# Altium PCB AP1220_MachXO2_DB.PcbDoc (part 1 of 2)
Units mil, origin at the board's own origin, x right, y up, seen from the top; angles counter-clockwise.
Board outline 3005 x 3350 mil, 4 copper layers (Top Layer, GND PLANE, POWER PLANE, Bottom Layer); 120 components, 198 nets, 716 pads, 269 vias.
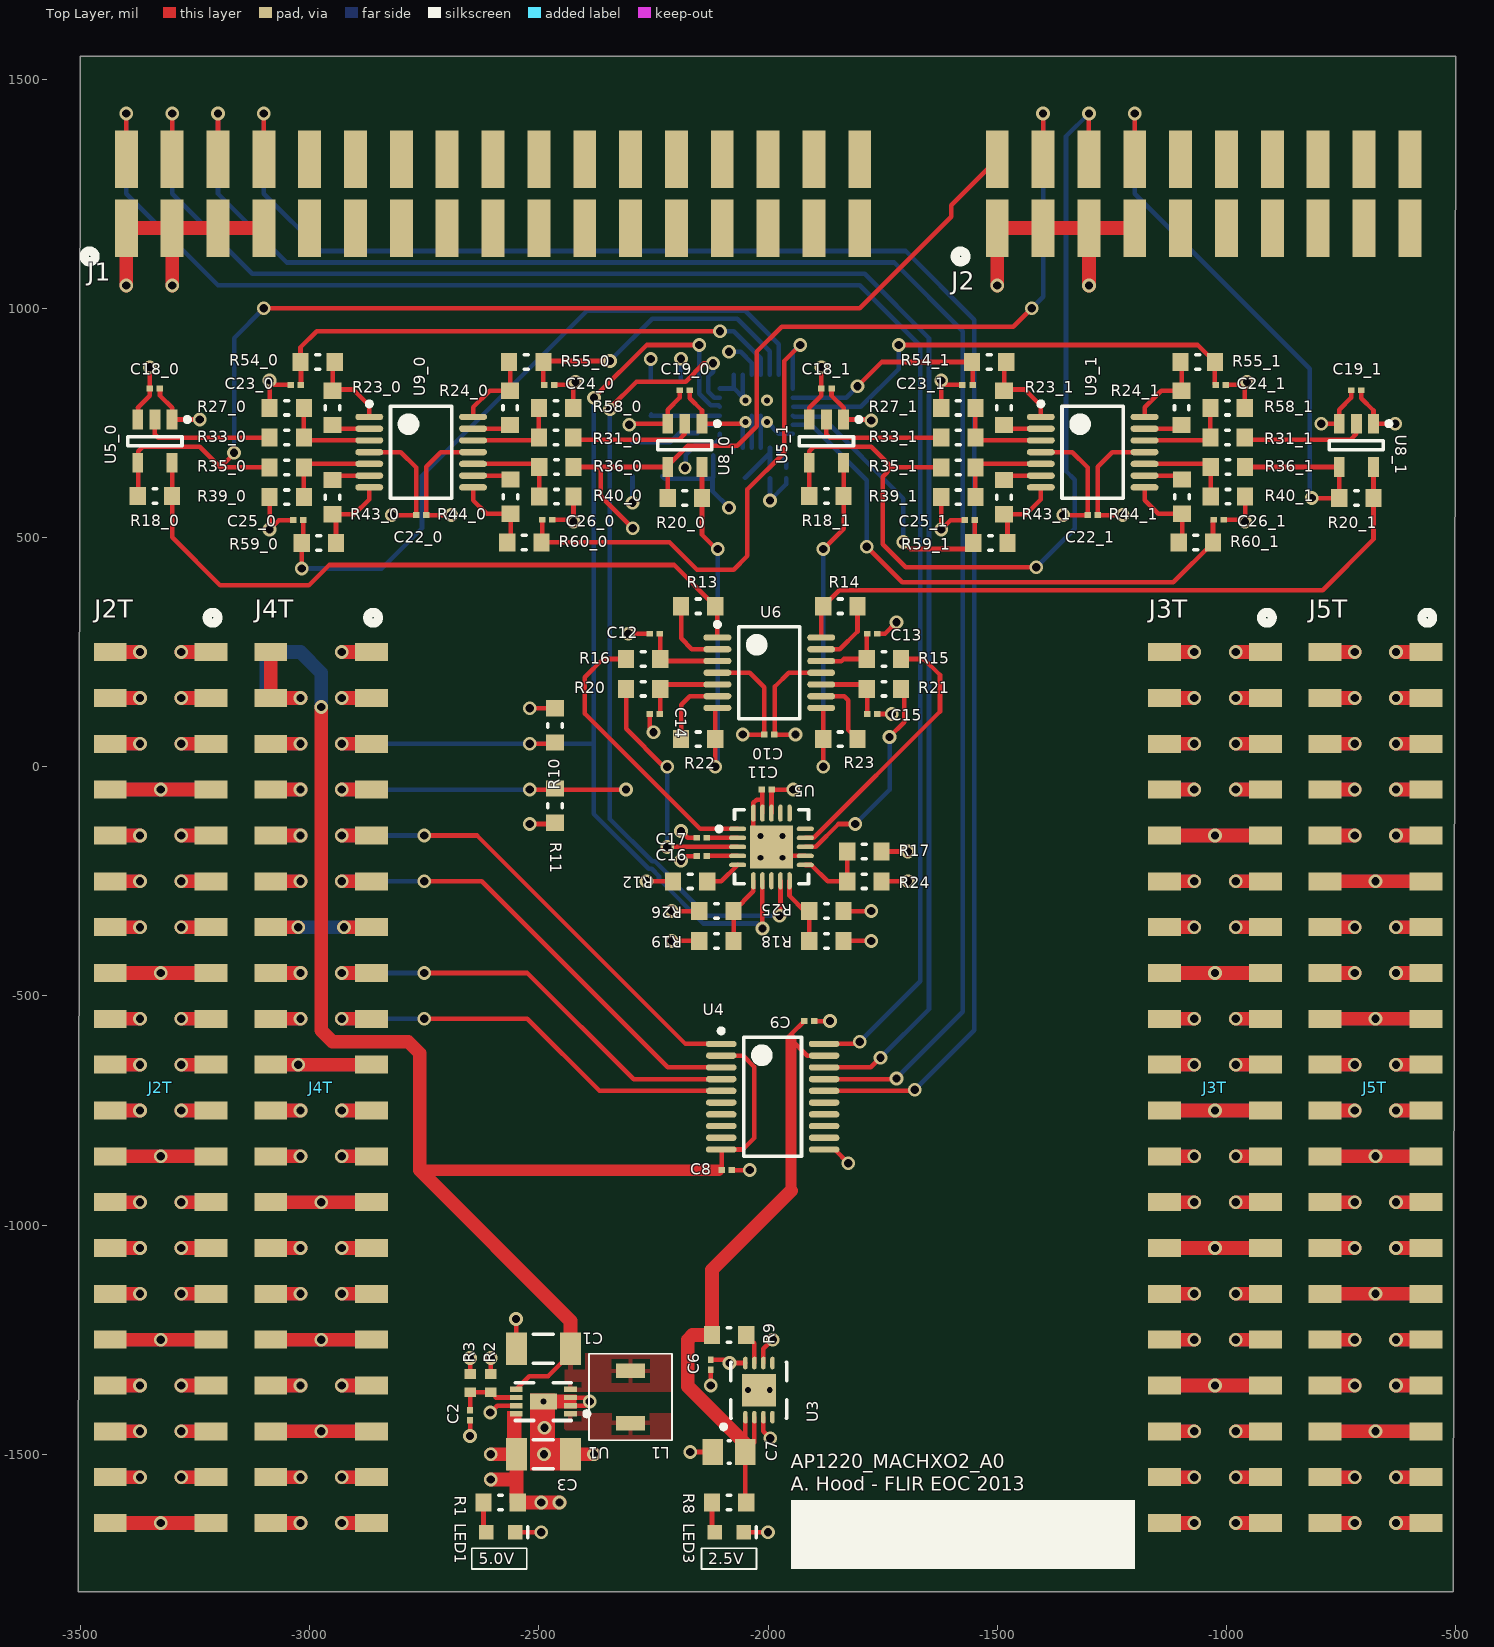
[diagram p0: Top Layer view]
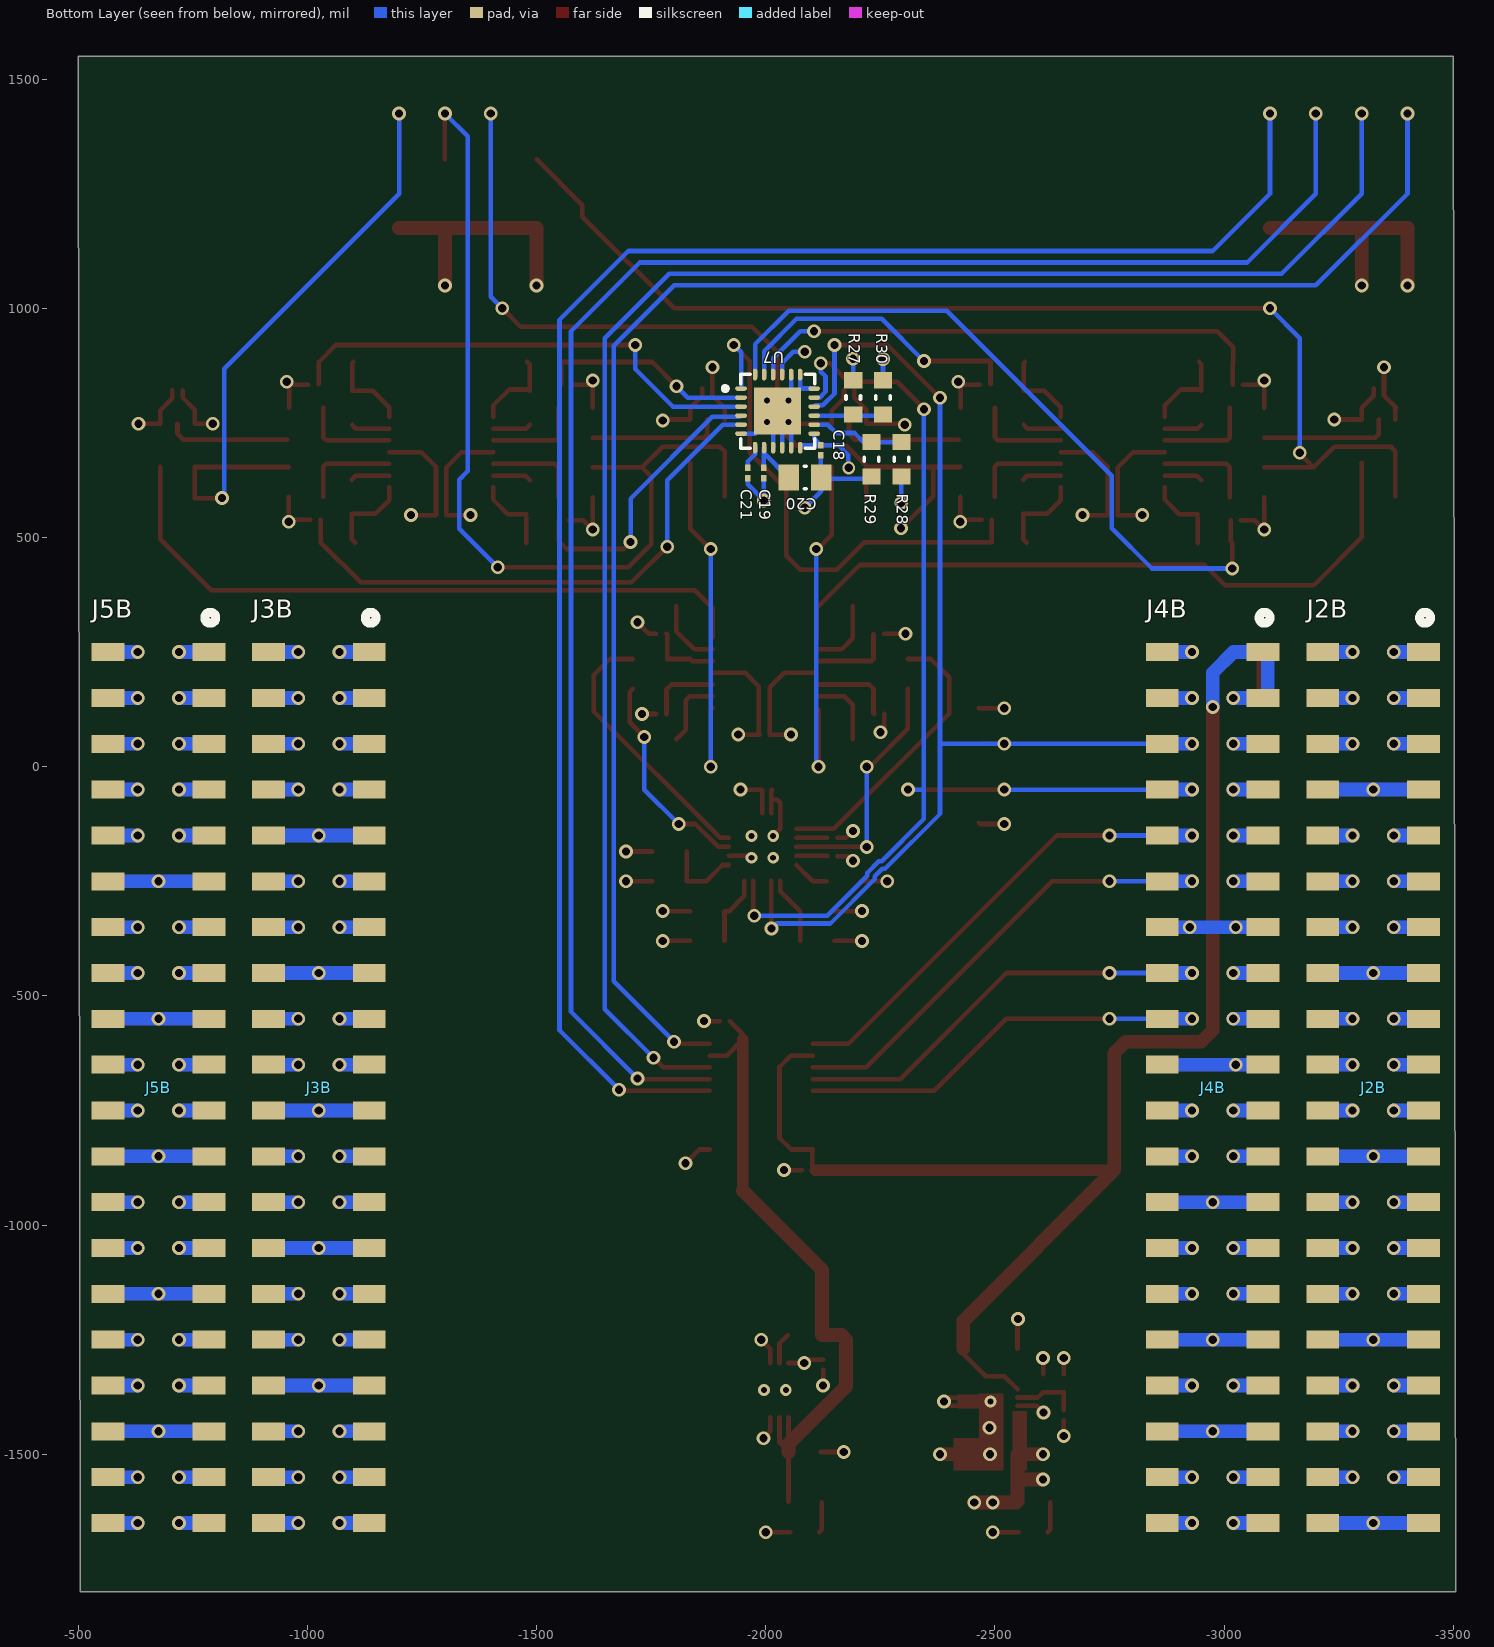
[diagram p1: Bottom Layer view, seen from below]
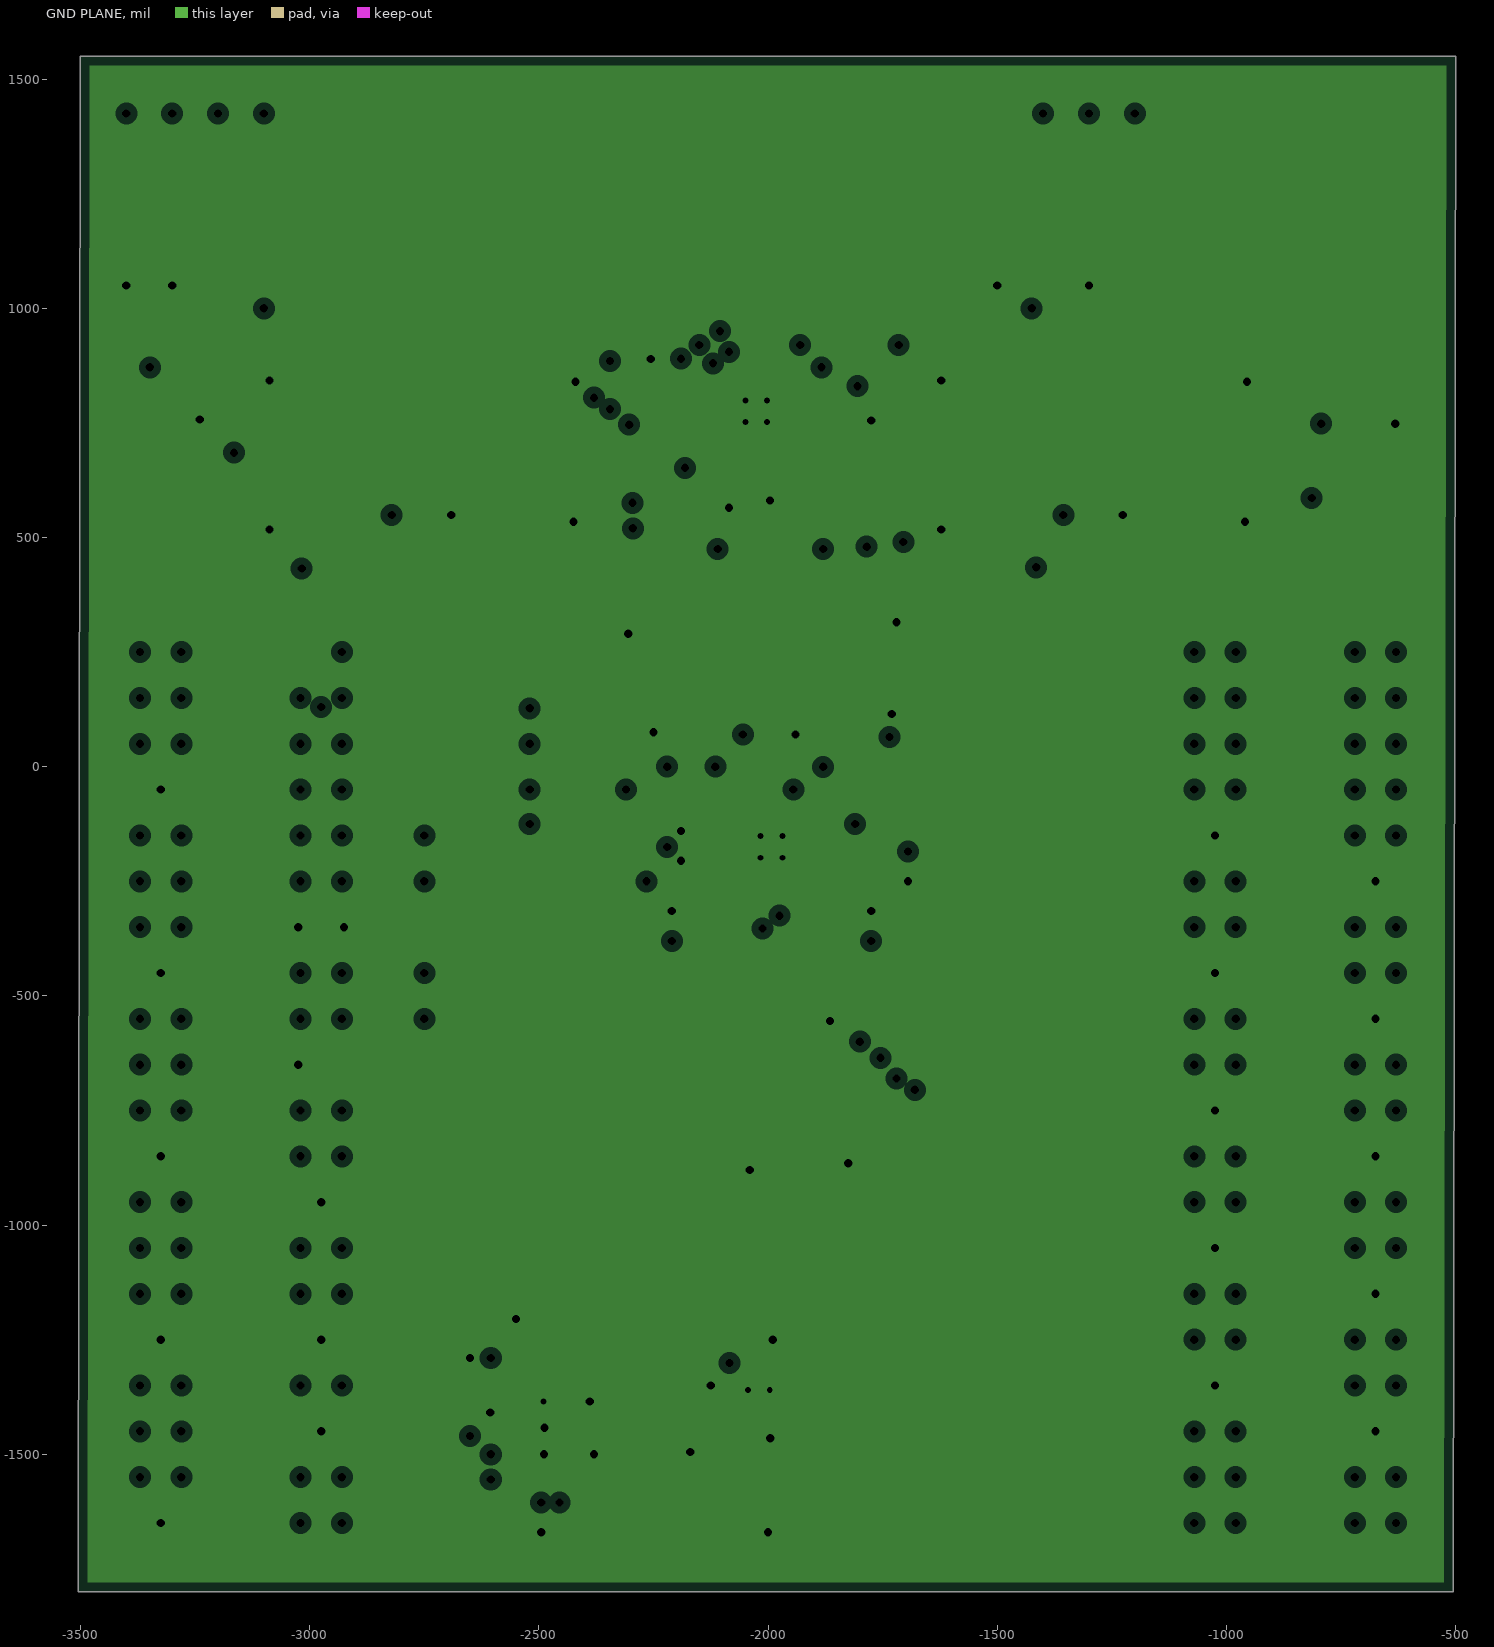
[diagram p2: GND PLANE, clearances drawn from the general rule]
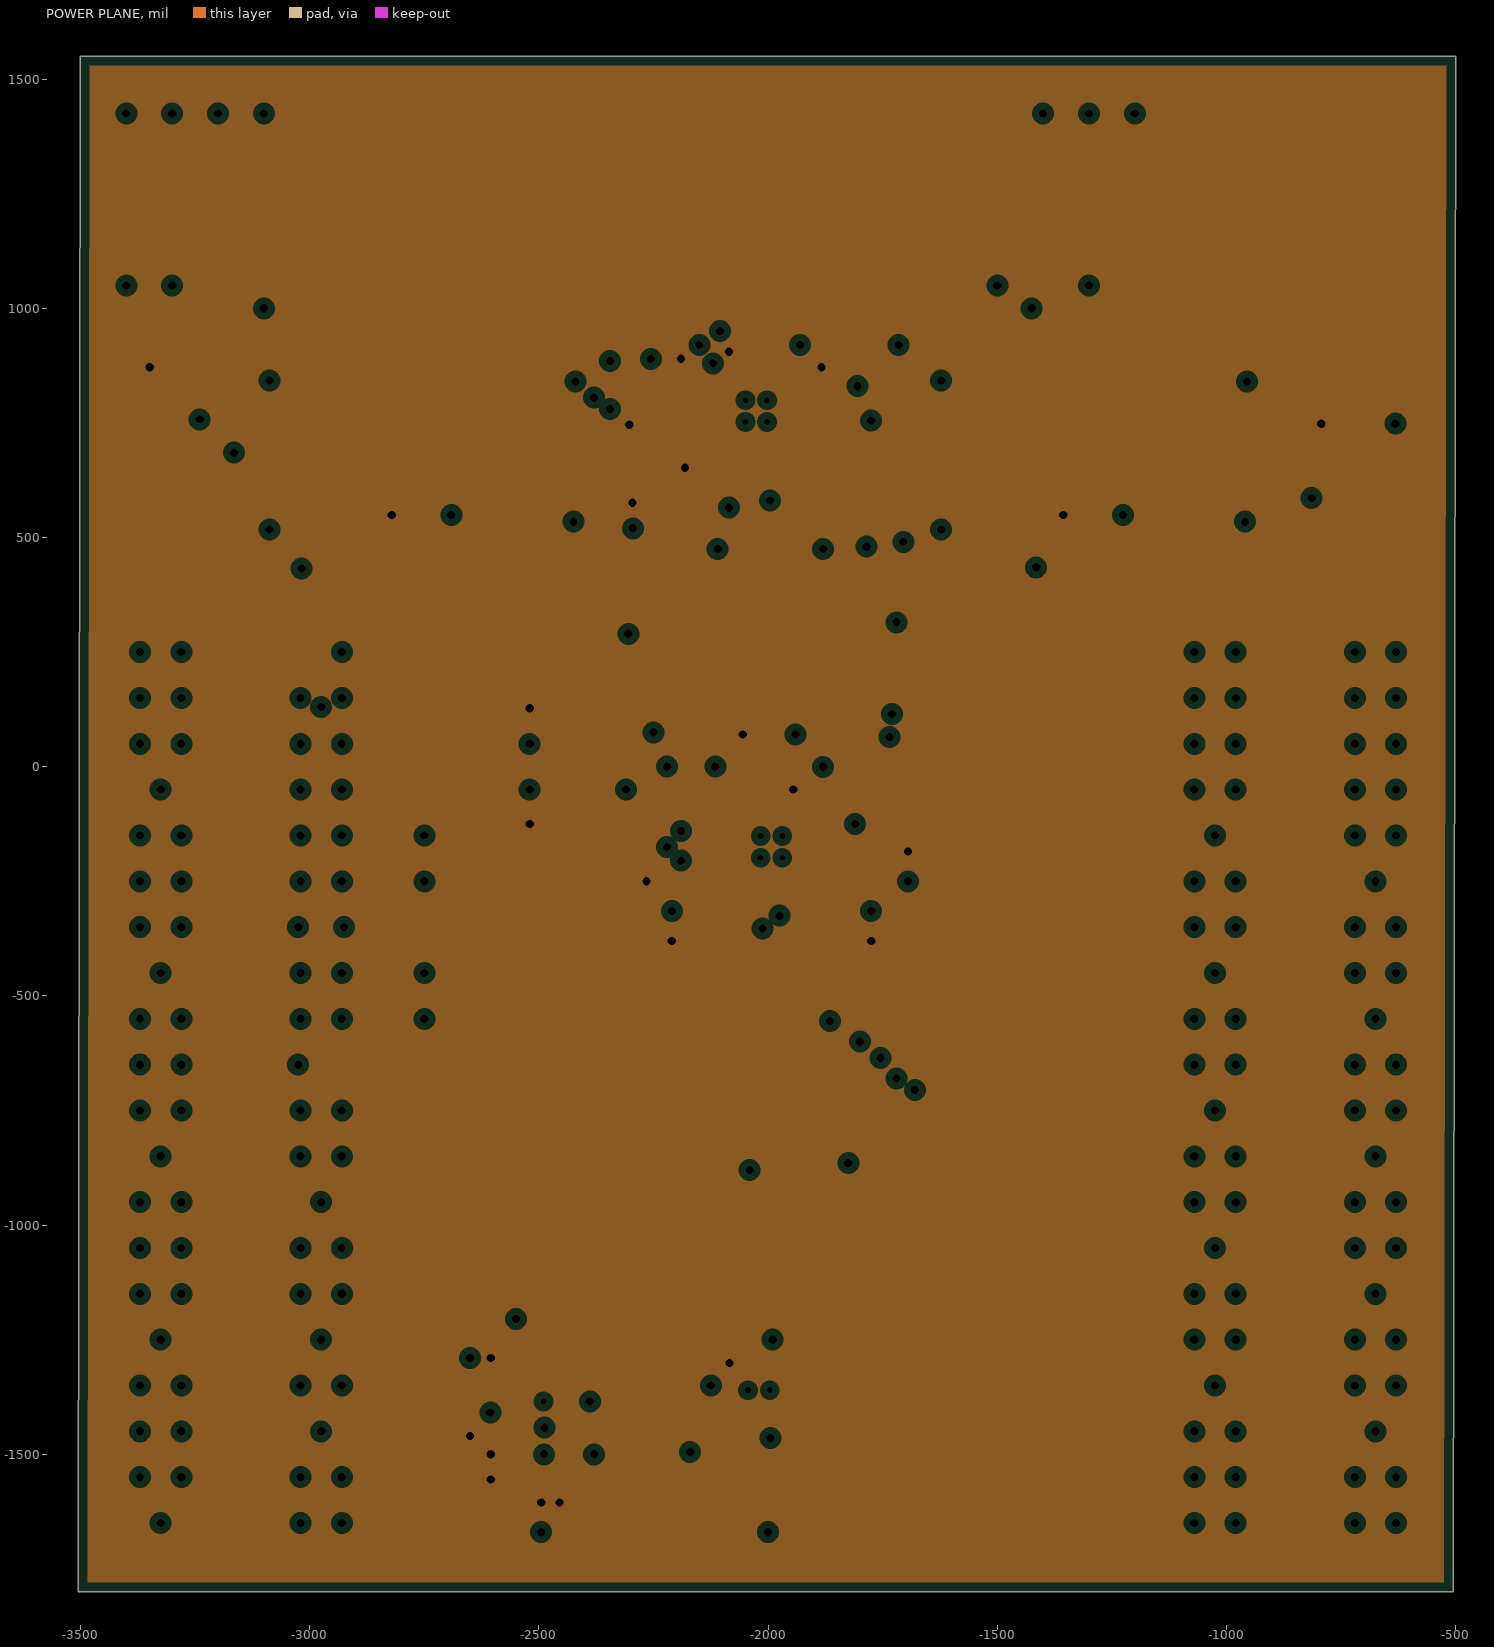
[diagram p3: POWER PLANE, clearances drawn from the general rule]
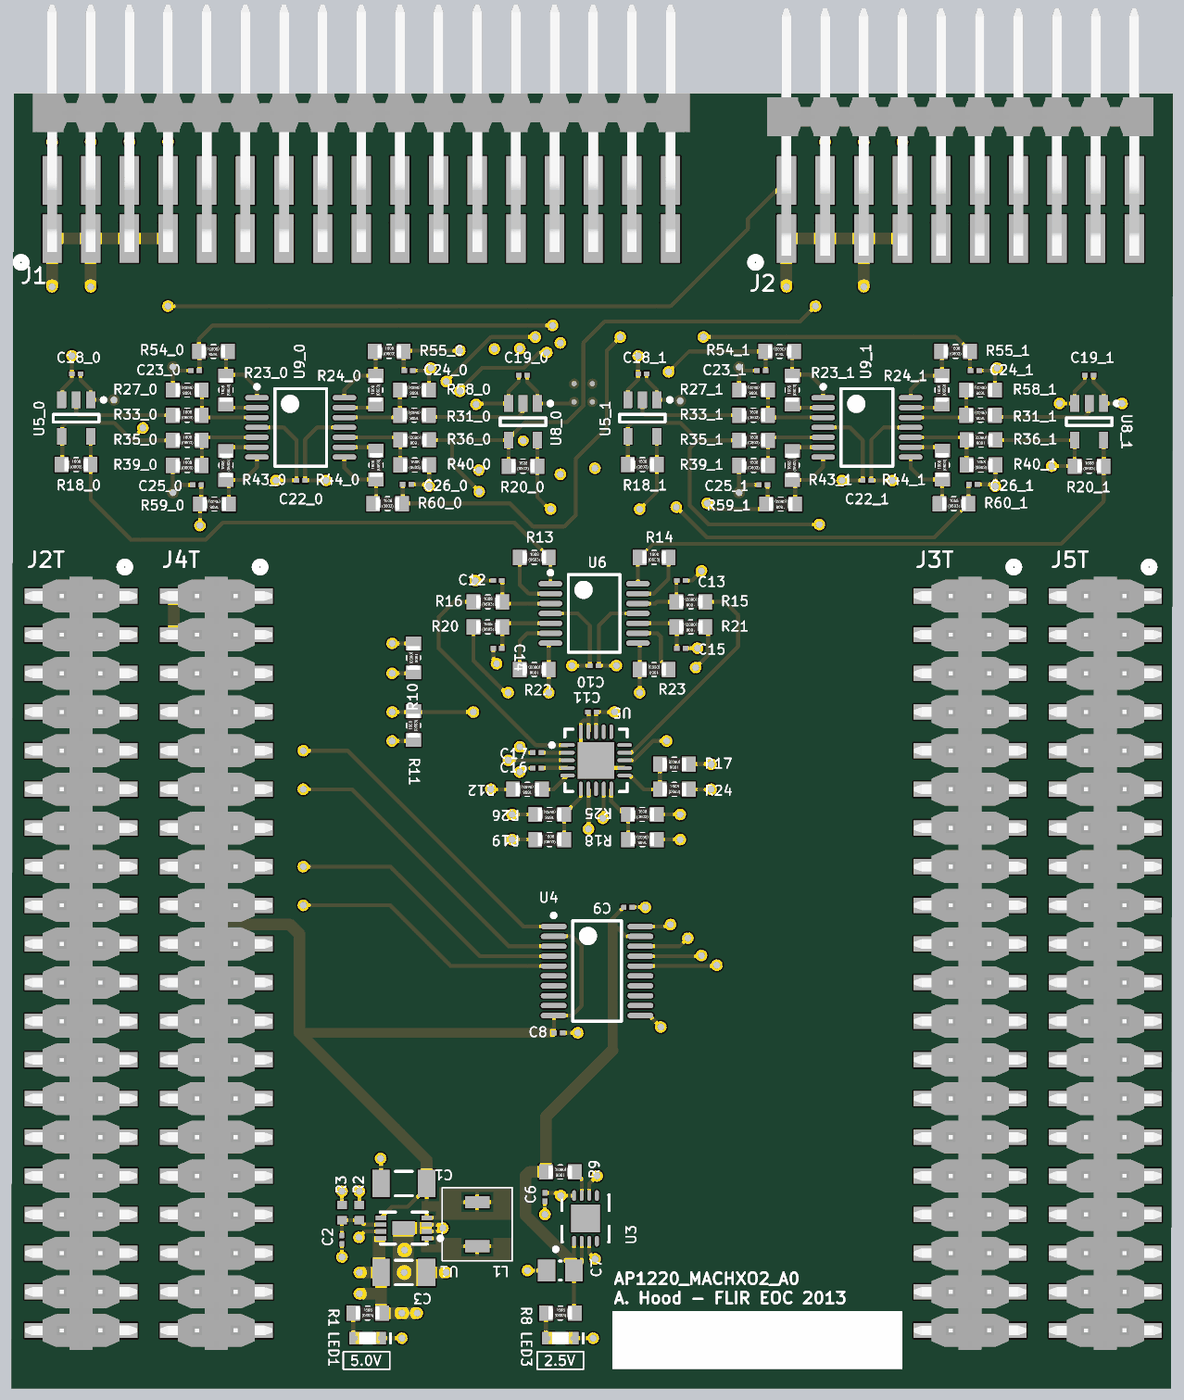
[diagram p5: 3D render of the assembled board from above, using the file's embedded part models]
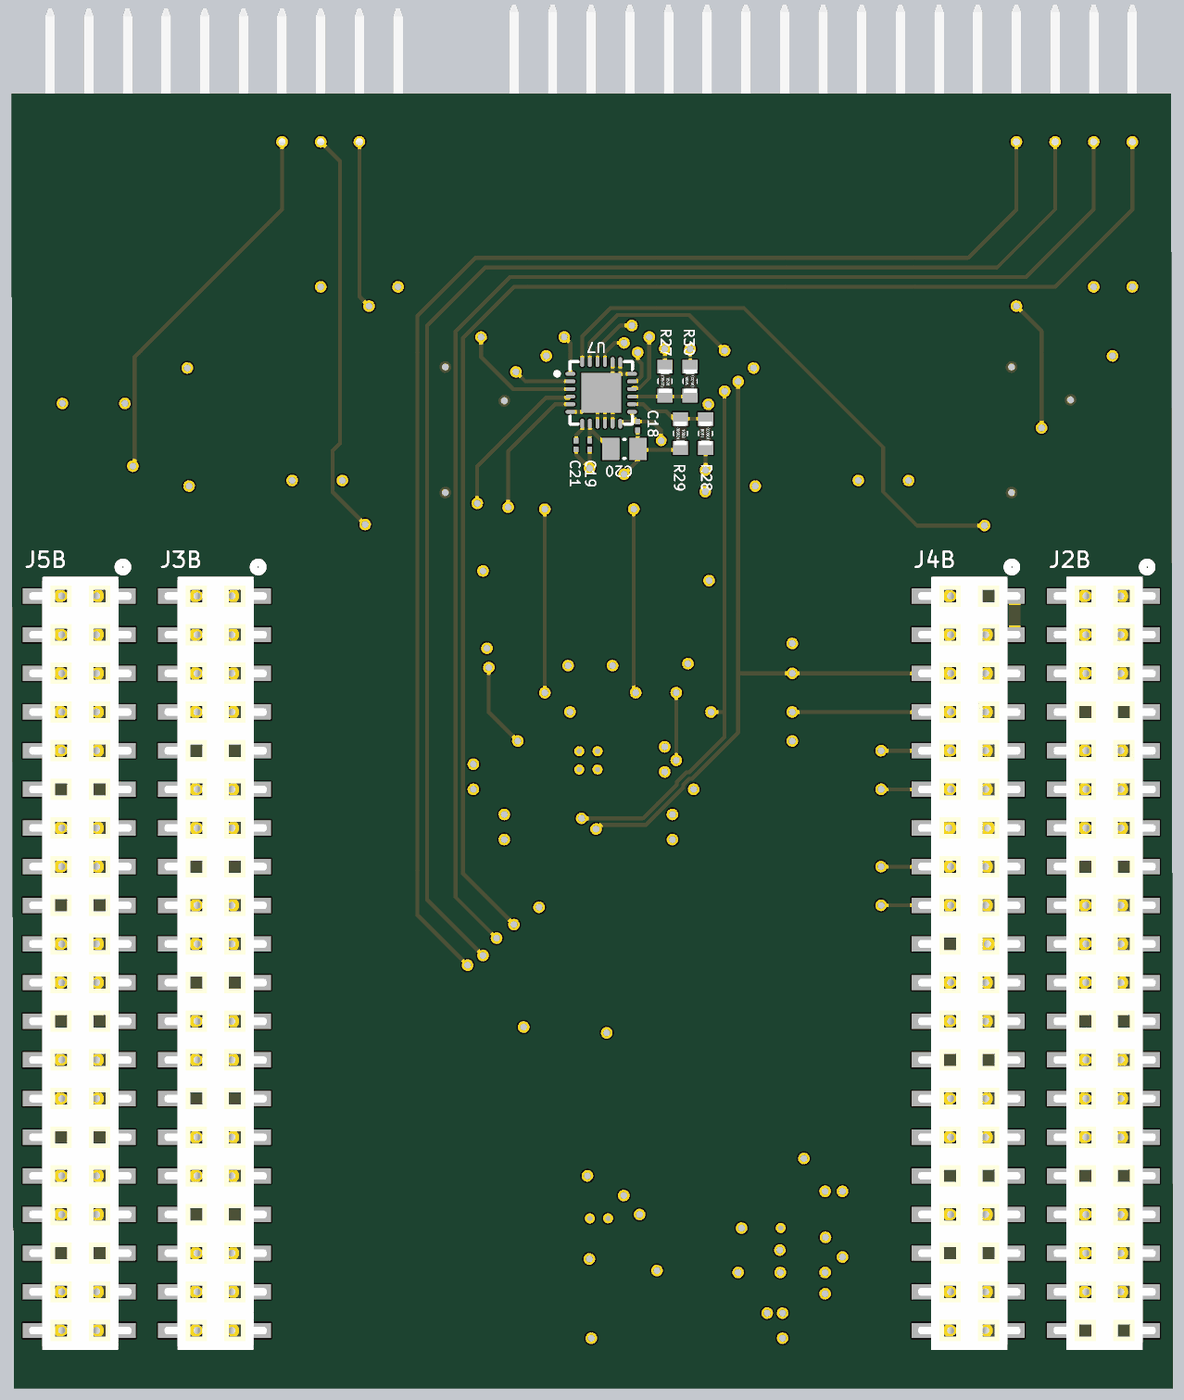
[diagram p6: 3D render of the assembled board from below, using the file's embedded part models]

## Layer stack, top to bottom
Top Layer: signal copper 1.4
Dielectric: core 12.6, FR-4, Dk 4.8
GND PLANE: plane copper 1.4, net GND
Dielectric: prepreg 12.6, FR-4, Dk 4.8
POWER PLANE: plane copper 1.4, net V5P0
Dielectric: core 12.6, FR-4, Dk 4.8
Bottom Layer: signal copper 1.4

## Board outline
-3505,-1800 -3500,1550 -500,1550 -505,-1800

## Design rules (kind name [scope] priority, off if disabled: settings)
Clearance [All] p1: gap=5
HoleSize [All] p1: absolutevalues=TRUE maxlimit=100 minlimit=15 maxpercent=80.000 minpercent=20.000
MinimumAnnularRing [All] p1: minimumring=5
MinimumSolderMaskSliver [All] p1: minsoldermaskwidth=0
PlaneClearance [All] p1: clearance=15
PlaneConnect U7_Thermal [(InComponent('U5') AND InComponent('U7'))] p1: planeconnectstyle=Direct reliefexpansion=20 reliefentries=4 reliefconductorwidth=10 reliefairgap=6 // reduce thermals for QFN part to not create overlaps
PlaneConnect [All] p2: planeconnectstyle=Relief reliefexpansion=10 reliefentries=4 reliefconductorwidth=10 reliefairgap=6
PolygonConnect U7U5_Polygon_Thermal [(InComponent('U5') AND InComponent('U7'))] p1: connectstyle=Direct reliefconductorwidth=10 reliefentries=4 polygonreliefangle="90 Angle" airgapwidth=10
PolygonConnect [All] p2: connectstyle=Relief reliefconductorwidth=10 reliefentries=4 polygonreliefangle="90 Angle" airgapwidth=10
RoutingVias [All] p1: holewidth=18 width=30 viastyle="Through Hole" minholewidth=4 minwidth=20 maxholewidth=28 maxwidth=50
SilkscreenOverComponentPads [All] p1: minsilkscreentomaskgap=10
SolderMaskExpansion SolderMaskExpansion_Via [IsVia And (Not IsTestpoint)] p1: expansion=-5000
SolderMaskExpansion [All] p2: expansion=4
Width [All] p1: maxlimit=50 minlimit=10 preferedwidth=10
23 further rules are at their usual default settings.

## Classes and differential pairs
component class Designator: C18 C19 C20 C21 R27 R28 R29 R30 U7
component class Designator: C10 C11 C12 C13 C14 C15 C16 C17 R12 R13 R14 R15 R16 R17 R18 R19 R20 R21 R22 R23 R24 R25 R26 U5 U6
component class Designator: J2B J2T J3B J3T J4B J4T J5B J5T R10 R11
component class Designator: C1 C2 C3 C6 C7 C8 C9 L1 LED1 LED3 R1 R2 R3 R8 R9 U1 U3 U4
component class 0: C18_0 C19_0 C22_0 C23_0 C24_0 C25_0 C26_0 R18_0 R20_0 R23_0 R24_0 R27_0 R31_0 R33_0 R35_0 R36_0 R39_0 R40_0 R43_0 R44_0 R54_0 R55_0 R58_0 R59_0 R60_0 U5_0 U8_0 U9_0
component class 1: C18_1 C19_1 C22_1 C23_1 C24_1 C25_1 C26_1 R18_1 R20_1 R23_1 R24_1 R27_1 R31_1 R33_1 R35_1 R36_1 R39_1 R40_1 R43_1 R44_1 R54_1 R55_1 R58_1 R59_1 R60_1 U5_1 U8_1 U9_1
channel class "SENSE AMP - 4 CH": 0 1

## Components (designator, comment, footprint, x,y, rotation, side; value= is the part's Value field where it differs from the comment)
C1 "587-1329-2-ND" CAPC1206(3216)170_N -2490,-1270 r0 top
C2 "CAP, 0402, 33pF" CAPC01005(0402)22_N -2650,-1415 r270 top
C3 "CAP, 1206, 47uF" CAPC1206(3216)170_N -2490,-1500 r180 top
C6 "CAP, 0402, 1uF" CAPC01005(0402)22_N -2125,-1305 r90 top
C7 "CAP, 0805, 10uF" CAPC0805(2012)130_N -2085,-1495 r0 top
C8 "CAP, 0402, 1uF" CAPC01005(0402)22_N -2090,-880 r180 top
C9 "CAP, 0402, 1uF" CAPC01005(0402)22_N -1910,-555 r180 top
C10 "CAP, 0402, 1uF" CAPC01005(0402)22_N -1997.4,70 r180 top
C11 "CAP, 0402, 1uF" CAPC01005(0402)22_N -2002.6,-50 r0 top
C12 "CAP, 0402, 0.1uF" CAPC01005(0402)22_N -2247.4,290 r180 top
C13 "CAP, 0402, 0.1uF" CAPC01005(0402)22_N -1772.4,290 r180 top
C14 "CAP, 0402, 0.1uF" CAPC01005(0402)22_N -2247.4,115 r0 top
C15 "CAP, 0402, 0.1uF" CAPC01005(0402)22_N -1772.4,115 r0 top
C16 "CAP, 0402, 0.1uF" CAPC01005(0402)22_N -2145,-195 r0 top
C17 "CAP, 0402, 0.1uF" CAPC01005(0402)22_N -2145,-155 r0 top
C18 "CAP, 0402, 1uF" CAPC01005(0402)22_N -2120,690 r90 bottom
C18_0 "CAP, 0402, 1uF" CAPC01005(0402)22_N -3337.64,825 r180 top (schematic designator C18)
C18_1 "CAP, 0402, 1uF" CAPC01005(0402)22_N -1872.64,825 r180 top (schematic designator C18)
C19 "CAP, 0402, 0.1uF" CAPC01005(0402)22_N -1995.79,640.74 r90 bottom
C19_0 "CAP, 0402, 1uF" CAPC01005(0402)22_N -2181.61,821.02 r180 top (schematic designator C19)
C19_1 "CAP, 0402, 1uF" CAPC01005(0402)22_N -716.61,821.02 r180 top (schematic designator C19)
C20 "CAP, 0805, 10uF" CAPC0805(2012)130_N -2085.79,630.74 r0 bottom
C21 "CAP, 0402, 2.2uF" CAPC01005(0402)22_N -1960.79,640.74 r90 bottom
C22_0 "CAP, 0402, 1uF" CAPC01005(0402)22_N -2756.61,548.98 r180 top (schematic designator C22)
C22_1 "CAP, 0402, 1uF" CAPC01005(0402)22_N -1291.61,548.98 r180 top (schematic designator C22)
C23_0 "CAP, 0402, 2.2nF" CAPC01005(0402)22_N -3030,832.95 r0 top (schematic designator C23)
C23_1 "CAP, 0402, 2.2nF" CAPC01005(0402)22_N -1565,832.95 r0 top (schematic designator C23)
C24_0 "CAP, 0402, 2.2nF" CAPC01005(0402)22_N -2477.6,832.95 r180 top (schematic designator C24)
C24_1 "CAP, 0402, 2.2nF" CAPC01005(0402)22_N -1012.6,832.95 r180 top (schematic designator C24)
C25_0 "CAP, 0402, 2.2nF" CAPC01005(0402)22_N -3025,537.95 r0 top (schematic designator C25)
C25_1 "CAP, 0402, 2.2nF" CAPC01005(0402)22_N -1560,537.95 r0 top (schematic designator C25)
C26_0 "CAP, 0402, 2.2nF" CAPC01005(0402)22_N -2481.81,538.98 r180 top (schematic designator C26)
C26_1 "CAP, 0402, 2.2nF" CAPC01005(0402)22_N -1016.81,538.98 r180 top (schematic designator C26)
J1 "TSM-117-01-L-DH" HEADER_25.4MM_17x2_SMT_RA_TOP -3400,1175 r90 top
J2 "TSM-110-01-L-DH" HEADER_25.4MM_10x2_SMT_RA_TOP -1500,1175 r90 top
J2B "MachXO2_BOB_J2" "RECEPTACLE_25.4MM_20x2_P1URC_SMT - duplicate" -3215,250 r180 bottom
J2T "MachXO2_BOB_J2" HEADER_25.4MM_20x2_SMT_TOP -3435,250 r0 top
J3B "MachXO2_BOB_J3" "RECEPTACLE_25.4MM_20x2_P1URC_SMT - duplicate" -915,250 r180 bottom
J3T "MachXO2_BOB_J3" HEADER_25.4MM_20x2_SMT_TOP -1135,250 r0 top
J4B "MachXO2_BOB_J4" "RECEPTACLE_25.4MM_20x2_P1URC_SMT - duplicate" -2865,250 r180 bottom
J4T "MachXO2_BOB_J4" HEADER_25.4MM_20x2_SMT_TOP -3085,250 r0 top
J5B "MachXO2_BOB_J5" "RECEPTACLE_25.4MM_20x2_P1URC_SMT - duplicate" -565,250 r180 bottom
J5T "MachXO2_BOB_J5" HEADER_25.4MM_20x2_SMT_TOP -785,250 r0 top
L1 "INDUCTOR, SMD, 2.2uF" "INDUCTOR, SMD, TDK" -2300,-1375 r180 top
LED1 "LED, GREEN, 0603, LITE-ON" "0603, LED" -2583.5,-1670 r180 top
LED3 "LED, GREEN, 0603, LITE-ON" "0603, LED" -2085,-1670 r180 top
R1 "270" "RES, 0603" -2583.5,-1605 r0 top
R2 "RES, 0402, 1M, 1%" RESC0402(1005)_N -2605,-1345 r90 top
R3 "RES, 0402, 309k, 1%" RESC0402(1005)_N -2650,-1345 r270 top
R8 "51" "RES, 0603" -2085,-1605 r0 top
R9 "100K" "RES, 0603" -2085,-1240 r180 top
R10 "10K" "RES, 0603" -2465,90 r270 top
R11 "10K" "RES, 0603" -2465,-85 r90 top
R12 "5.1K" "RES, 0603" -2170,-250 r180 top
R13 "1K" "RES, 0603" -2152.4,350 r0 top
R14 "1K" "RES, 0603" -1842.4,350 r0 top
R15 "10K" "RES, 0603" -1747.4,235 r180 top
R16 "10K" "RES, 0603" -2272.4,235 r0 top
R17 "10K" "RES, 0603" -1790,-185 r180 top
R18 "10K" "RES, 0603" -1872.6,-380 r180 top
R18_0 "RES, 0603, 0.1, 1%" "RES, 0603" -3337.64,590.2 r0 top (schematic designator R18)
R18_1 "RES, 0603, 0.1, 1%" "RES, 0603" -1872.64,590.2 r0 top (schematic designator R18)
R19 "10K" "RES, 0603" -2112.6,-380 r0 top
R20 "10K" "RES, 0603" -2272.4,170 r0 top
R20_0 "RES, 0603, 0.1, 1%" "RES, 0603" -2181.61,586.02 r0 top (schematic designator R20)
R20_1 "RES, 0603, 0.1, 1%" "RES, 0603" -716.61,586.02 r0 top (schematic designator R20)
R21 "10K" "RES, 0603" -1747.4,170 r180 top
R22 "1K" "RES, 0603" -2152.4,60 r180 top
R23 "1K" "RES, 0603" -1842.4,60 r180 top
R23_0 "1K" "RES, 0603" -2950,782.95 r90 top (schematic designator R23)
R23_1 "1K" "RES, 0603" -1485,782.95 r90 top (schematic designator R23)
R24 "10K" "RES, 0603" -1790,-250 r0 top
R24_0 "1K" "RES, 0603" -2562.6,782.95 r90 top (schematic designator R24)
R24_1 "1K" "RES, 0603" -1097.6,782.95 r90 top (schematic designator R24)
R25 "10K" "RES, 0603" -1872.6,-315 r0 top
R26 "10K" "RES, 0603" -2112.6,-315 r180 top
R27 "10K" "RES, 0603" -2295.79,670.74 r90 bottom
R27_0 "10K" "RES, 0603" -3050,782.95 r180 top (schematic designator R27)
R27_1 "10K" "RES, 0603" -1585,782.95 r180 top (schematic designator R27)
R28 "10K" "RES, 0603" -2190.79,805.74 r270 bottom
R29 "10K" "RES, 0603" -2230.79,670.74 r270 bottom
R30 "10K" "RES, 0603" -2255.79,805.74 r90 bottom
R31_0 "10K" "RES, 0603" -2462.6,717.95 r180 top (schematic designator R31)
R31_1 "10K" "RES, 0603" -997.6,717.95 r180 top (schematic designator R31)
R33_0 "10K" "RES, 0603" -3050,717.95 r0 top (schematic designator R33)
R33_1 "10K" "RES, 0603" -1585,717.95 r0 top (schematic designator R33)
R35_0 "10K" "RES, 0603" -3050,652.95 r0 top (schematic designator R35)
R35_1 "10K" "RES, 0603" -1585,652.95 r0 top (schematic designator R35)
R36_0 "10K" "RES, 0603" -2461.81,653.98 r180 top (schematic designator R36)
R36_1 "10K" "RES, 0603" -996.81,653.98 r180 top (schematic designator R36)
R39_0 "10K" "RES, 0603" -3050,587.95 r0 top (schematic designator R39)
R39_1 "10K" "RES, 0603" -1585,587.95 r0 top (schematic designator R39)
R40_0 "10K" "RES, 0603" -2461.81,588.98 r0 top (schematic designator R40)
R40_1 "10K" "RES, 0603" -996.81,588.98 r0 top (schematic designator R40)
R43_0 "1K" "RES, 0603" -2950,587.95 r90 top (schematic designator R43)
R43_1 "1K" "RES, 0603" -1485,587.95 r90 top (schematic designator R43)
R44_0 "1K" "RES, 0603" -2561.81,588.98 r90 top (schematic designator R44)
R44_1 "1K" "RES, 0603" -1096.81,588.98 r90 top (schematic designator R44)
R54_0 "51" "RES, 0603" -2982.6,882.95 r180 top (schematic designator R54)
R54_1 "51" "RES, 0603" -1517.6,882.95 r180 top (schematic designator R54)
R55_0 "51" "RES, 0603" -2527.6,882.95 r0 top (schematic designator R55)
R55_1 "51" "RES, 0603" -1062.6,882.95 r0 top (schematic designator R55)
R58_0 "10K" "RES, 0603" -2462.6,782.95 r180 top (schematic designator R58)
R58_1 "10K" "RES, 0603" -997.6,782.95 r180 top (schematic designator R58)
R59_0 "51" "RES, 0603" -2980,487.95 r180 top (schematic designator R59)
R59_1 "51" "RES, 0603" -1515,487.95 r180 top (schematic designator R59)
R60_0 "51" "RES, 0603" -2531.81,488.98 r0 top (schematic designator R60)
R60_1 "51" "RES, 0603" -1066.81,488.98 r0 top (schematic designator R60)
U1 "LTC3539" QFN45P300X200X80-8N -2490,-1385 r180 top
U3 "ADP7104ACPZ-2.5-R7" QFN50P300X300X75-8N -2020,-1360 r90 top
U4 "TXB0108" TSOP65P640X120-20N -1990,-720 r0 top
U5 "LTC2655" QFN50P400X400X70-20N -1992.6,-175 r0 top
U5_0 "MAX4372HEUK" "SOT23-5, MAX4372H" -3337.64,710.2 r270 top (schematic designator U5)
U5_1 "MAX4372HEUK" "SOT23-5, MAX4372H" -1872.64,710.2 r270 top (schematic designator U5)
U6 "AD8608" TSOP65P640X120-14N -1997.4,205 r0 top
U7 "LTC2309" QFN50P400X400X80-24N -2025.79,775.74 r180 bottom
U8_0 "MAX4372HEUK" "SOT23-5, MAX4372H" -2181.61,701.02 r270 top (schematic designator U8)
U8_1 "MAX4372HEUK" "SOT23-5, MAX4372H" -716.61,701.02 r270 top (schematic designator U8)
U9_0 "AD8608" TSOP65P640X120-14N -2756.81,686.18 r0 top (schematic designator U9)
U9_1 "AD8608" TSOP65P640X120-14N -1291.81,686.18 r0 top (schematic designator U9)

## Footprints (in the part's own frame and the unit in brackets; to place one, negate y for a bottom-side part, rotate by r counter-clockwise, add the part's x,y. Pads: shape width x height; smd on the part's side, far side on the other; paste and mask are expansions set on the pad)
"0603, LED" [mm] "Chip LED, 2-Leads, Body 1.6x0.8mm, IPC Medium Density"
  rect 0.8x0.8 smd: 1(-0.8,0) 2(0.8,0)
  silkscreen extent -1.5,-0.3 -1.5,0.3, body extent -0.8,-0.4 0.8,0.4, height 0.7
CAPC0805(2012)130_N [mm] "Chip Capacitor, Body 2.0x1.2mm, Height 1.3mm, IPC Medium Density"
  rect 1.15x1.45 smd: 1(-0.9,0) 2(0.9,0)
  silkscreen extent -0.05,-0.62 0.05,0.63, body extent -1.1,-0.72 1.1,0.73, height 1.3
CAPC01005(0402)22_N [mm] "Chip Capacitor, Body 0.4x0.2mm, Height 0.22mm, IPC Medium Density"
  rect 0.36x0.32 smd: 1(-0.28,0) 2(0.28,0)
  body extent -0.21,-0.11 0.21,0.11, height 0.22
CAPC1206(3216)170_N [mm] "Chip Capacitor, Body 3.2x1.6mm, Height 1.7mm, IPC Medium Density"
  rect 1.15x1.8 smd: 1(-1.5,0) 2(1.5,0)
  silkscreen extent -0.55,-0.8 0.55,0.8, body extent -1.7,-0.9 1.7,0.9, height 1.7
HEADER_25.4MM_10x2_SMT_RA_TOP [mm] "Samtec TSM 0.1\" 1x10 Header"
  rect 3.18x1.27 smd: 1(0,0) 2(3.81,0) 3(0,-2.54) 4(3.81,-2.54) 5(0,-5.08) 6(3.81,-5.08) 7(0,-7.62) 8(3.81,-7.62) 9(0,-10.16) 10(3.81,-10.16) 11(0,-12.7) 12(3.81,-12.7) 13(0,-15.24) 14(3.81,-15.24) 15(0,-17.78) 16(3.81,-17.78) 17(0,-20.32) 18(3.81,-20.32) 19(0,-22.86) 20(3.81,-22.86)
  silkscreen extent -1.87,1.73 -1.27,2.33, body extent -1.14,-24.13 15.11,1.27, height 6.1
HEADER_25.4MM_17x2_SMT_RA_TOP [mm] "Samtec TSM 0.1\" 1x17 Header"
  rect 3.18x1.27 smd: 1(0,0) 2(3.81,0) 3(0,-2.54) 4(3.81,-2.54) 5(0,-5.08) 6(3.81,-5.08) 7(0,-7.62) 8(3.81,-7.62) 9(0,-10.16) 10(3.81,-10.16) 11(0,-12.7) 12(3.81,-12.7) 13(0,-15.24) 14(3.81,-15.24) 15(0,-17.78) 16(3.81,-17.78) 17(0,-20.32) 18(3.81,-20.32) 19(0,-22.86) 20(3.81,-22.86) 21(0,-25.4) 22(3.81,-25.4) 23(0,-27.94) 24(3.81,-27.94) 25(0,-30.48) 26(3.81,-30.48) 27(0,-33.02) 28(3.81,-33.02) 29(0,-35.56) 30(3.81,-35.56) 31(0,-38.1) 32(3.81,-38.1) 33(0,-40.64) 34(3.81,-40.64)
  silkscreen extent -1.87,1.73 -1.27,2.33, body extent -0.89,-41.91 15.37,1.27, height 6.05
HEADER_25.4MM_20x2_SMT_TOP [mm] "Samtec TSM 0.1\" 2x20 Header"
  rect 1.82x1 smd: 1(0,0) 2(5.588,0) 3(0,-2.54) 4(5.588,-2.54) 5(0,-5.08) 6(5.588,-5.08) 7(0,-7.62) 8(5.588,-7.62) 9(0,-10.16) 10(5.588,-10.16) 11(0,-12.7) 12(5.588,-12.7) 13(0,-15.24) 14(5.588,-15.24) 15(0,-17.78) 16(5.588,-17.78) 17(0,-20.32) 18(5.588,-20.32) 19(0,-22.86) 20(5.588,-22.86) 21(0,-25.4) 22(5.588,-25.4) 23(0,-27.94) 24(5.588,-27.94) 25(0,-30.48) 26(5.588,-30.48) 27(0,-33.02) 28(5.588,-33.02) 29(0,-35.56) 30(5.588,-35.56) 31(0,-38.1) 32(5.588,-38.1) 33(0,-40.64) 34(5.588,-40.64) 35(0,-43.18) 36(5.588,-43.18) 37(0,-45.72) 38(5.588,-45.72) 39(0,-48.26) 40(5.588,-48.26)
  silkscreen extent 5.37,1.61 5.97,2.2, body extent -0.89,-49.53 6.48,1.27, height 9.61
"INDUCTOR, SMD, TDK" [mm] "TDK VLF SERIES, VLF5014S"
  rect 1.6x0.8 smd: 1(0,-1.45) 2(0,1.45)
  silkscreen extent -2.3,-2.4 2.3,2.4
QFN45P300X200X80-8N [mm] "QFN, 8-Leads, Body 2.1x3.1mm (max), Pitch 0.45mm, IPC Medium Density"
  rect 0.7x0.3 smd: 1(-1.5,0.675) 2(-1.5,0.225) 3(-1.5,-0.225) 4(-1.5,-0.675) 5(1.5,-0.675) 6(1.5,-0.225) 7(1.5,0.225) 8(1.5,0.675)
  rect 1.5x0.9 smd: 9(0,0)
  silkscreen extent -2.53,-1.05 1.55,1.05, body extent -1.55,-1.05 1.55,1.05, height 0.8
QFN50P300X300X75-8N [mm] "QFN, 8-Leads, Body 3.1x3.1mm (max), Pitch 0.50mm, IPC Medium Density"
  oval 0.7x0.25 smd: 1(-1.5,0.75) 2(-1.5,0.25) 3(-1.5,-0.25) 4(-1.5,-0.75) 5(1.5,-0.75) 6(1.5,-0.25) 7(1.5,0.25) 8(1.5,0.75)
  rect 1.8x1.9 smd: 9(0,0)
  silkscreen extent -2.16,-1.55 1.55,2.08, body extent -1.55,-1.55 1.55,1.55, height 0.75
QFN50P400X400X70-20N [mm] "QFN, 20-Leads, Body 4.1x4.1mm (max), Pitch 0.50mm, IPC Medium Density"
  oval 0.95x0.25 smd: 1(-1.875,1) 2(-1.875,0.5) 3(-1.875,0) 4(-1.875,-0.5) 5(-1.875,-1) 11(1.875,-1) 12(1.875,-0.5) 13(1.875,0) 14(1.875,0.5) 15(1.875,1)
  oval 0.25x0.95 smd: 6(-1,-1.875) 7(-0.5,-1.875) 8(0,-1.875) 9(0.5,-1.875) 10(1,-1.875) 16(1,1.875) 17(0.5,1.875) 18(0,1.875) 19(-0.5,1.875) 20(-1,1.875)
  rect 2.4x2.4 smd: 21(0,0)
  silkscreen extent -3.02,-2.05 2.05,2.05, body extent -2.05,-2.05 2.05,2.05, height 0.8
QFN50P400X400X80-24N [mm] "QFN, 24-Leads, Body 4.1x4.1mm (max), Pitch 0.50mm, IPC Medium Density"
  oval 0.65x0.25 smd: 1(-2.025,1.25) 2(-2.025,0.75) 3(-2.025,0.25) 4(-2.025,-0.25) 5(-2.025,-0.75) 6(-2.025,-1.25) 13(2.025,-1.25) 14(2.025,-0.75) 15(2.025,-0.25) 16(2.025,0.25) 17(2.025,0.75) 18(2.025,1.25)
  oval 0.25x0.65 smd: 7(-1.25,-2.025) 8(-0.75,-2.025) 9(-0.25,-2.025) 10(0.25,-2.025) 11(0.75,-2.025) 12(1.25,-2.025) 19(1.25,2.025) 20(0.75,2.025) 21(0.25,2.025) 22(-0.25,2.025) 23(-0.75,2.025) 24(-1.25,2.025)
  rect 2.6x2.6 smd: 25(0,0)
  silkscreen extent -3.03,-2.05 2.05,2.05, body extent -2.05,-2.05 2.05,2.05, height 0.8
"RECEPTACLE_25.4MM_20x2_P1URC_SMT - duplicate" [mm] "3M 966 Series 20x2 through board SMIT receptacle"
  rect 1.82x1 smd: 1(5.588,0) 2(0,0) 3(5.588,-2.54) 4(0,-2.54) 5(5.588,-5.08) 6(0,-5.08) 7(5.588,-7.62) 8(0,-7.62) 9(5.588,-10.16) 10(0,-10.16) 11(5.588,-12.7) 12(0,-12.7) 13(5.588,-15.24) 14(0,-15.24) 15(5.588,-17.78) 16(0,-17.78) 17(5.588,-20.32) 18(0,-20.32) 19(5.588,-22.86) 20(0,-22.86) 21(5.588,-25.4) 22(0,-25.4) 23(5.588,-27.94) 24(0,-27.94) 25(5.588,-30.48) 26(0,-30.48) 27(5.588,-33.02) 28(0,-33.02) 29(5.588,-35.56) 30(0,-35.56) 31(5.588,-38.1) 32(0,-38.1) 33(5.588,-40.64) 34(0,-40.64) 35(5.588,-43.18) 36(0,-43.18) 37(5.588,-45.72) 38(0,-45.72) 39(5.588,-48.26) 40(0,-48.26)
  silkscreen extent 5.37,1.61 5.97,2.2, body extent -0.48,-49.53 6.22,1.27, height 5.01
"RES, 0603" [mm] "Chip Resistor, 2-Leads, Body 1.6x0.8mm, IPC Medium Density"
  rect 0.9x1 smd: 1(-0.95,0) 2(0.95,0)
  silkscreen extent -0.1,-0.4 0.1,0.4, body extent -0.77,-0.42 0.78,0.43, height 0.45
RESC0402(1005)_N [mm] "Chip Resistor, Body 1.0x0.5mm, IPC Medium Density"
  rect 0.55x0.65 smd: 1(-0.5,0) 2(0.5,0)
  body extent -0.52,-0.27 0.53,0.28, height 0.4
"SOT23-5, MAX4372H" [mm]
  rect 1.1x0.6 smd mask+0.064: 1(-1.2,0.95) 2(-1.2,0) 3(-1.2,-0.95) 4(1.2,-0.95) 5(1.2,0.95)
  silkscreen extent -1.32,-1.5 0.25,1.93, body extent -0.87,-1.5 0.87,1.5, height 1.3
TSOP65P640X120-14N [mm] "TSOP, 14-Leads, Body 5.1x4.5mm (max), Pitch 0.65mm, IPC Medium Density"
  oval 1.55x0.35 smd: 1(-2.875,1.95) 2(-2.875,1.3) 3(-2.875,0.65) 4(-2.875,0) 5(-2.875,-0.65) 6(-2.875,-1.3) 7(-2.875,-1.95) 8(2.875,-1.95) 9(2.875,-1.3) 10(2.875,-0.65) 11(2.875,0) 12(2.875,0.65) 13(2.875,1.3) 14(2.875,1.95)
  silkscreen extent -3,-2.55 1.7,2.8, body extent -2.25,-2.55 2.25,2.55, height 1.2
TSOP65P640X120-20N [mm] "TSOP, 20-Leads, Body 6.6x4.5mm (max), Pitch 0.65mm, IPC Medium Density"
  oval 1.7x0.35 smd: 1(-2.85,2.925) 2(-2.85,2.275) 3(-2.85,1.625) 4(-2.85,0.975) 5(-2.85,0.325) 6(-2.85,-0.325) 7(-2.85,-0.975) 8(-2.85,-1.625) 9(-2.85,-2.275) 10(-2.85,-2.925) 11(2.85,-2.925) 12(2.85,-2.275) 13(2.85,-1.625) 14(2.85,-0.975) 15(2.85,-0.325) 16(2.85,0.325) 17(2.85,0.975) 18(2.85,1.625) 19(2.85,2.275) 20(2.85,2.925)
  silkscreen extent -2.97,-3.3 1.6,3.77, body extent -2.25,-3.3 2.25,3.3, height 1.2

## Part data
C1: library part "CAP, 1206, 2.2uF"
R1: library part RES_0603_270, "Resistor, 0603, 1/10W, 270 ohm"
R8 R54_0 R54_1 R55_0 R55_1 R59_0 R59_1 R60_0 R60_1: library part RES_0603_51, "Resistor, 0603, 1/10W, 51 ohm"
R9: library part RES_0603_100K, "Resistor, 0603, 1/10W, 100K ohm"
R10 R11 R15 R16 R17 R18 R19 R20 R21 R24 R25 R26 R27 R27_0 R27_1 R28 R29 R30 R31_0 R31_1 R33_0 R33_1 R35_0 R35_1 R36_0 R36_1 R39_0 R39_1 R40_0 R40_1 R58_0 R58_1: library part RES_0603_10K, "Resistor, 0603, 1/10W, 10K ohm"
R12: library part RES_0603_5.1K, "Resistor, 0603, 1/10W, 5.1K ohm"
R13 R14 R22 R23 R23_0 R23_1 R24_0 R24_1 R43_0 R43_1 R44_0 R44_1: library part RES_0603_1K, "Resistor, 0603, 1/10W, 1K ohm"
U1: "2A, 1MHz/2MHz Synchronous Step-Up DC/DC Converters"
U3: "2.5V Voltage Regulator"
U4: library part "TXB0108; 8-bit Bi-Directional Voltage Translator"
U5: "Quad I2C 16-/12-Bit Rail-to-Rail DACs with 10ppm/°C Max Reference"
U5_0 U5_1 U8_0 U8_1: library part "MAX4372H, Current-Sense, SOT23"
U6: library part "AD8608; Quad Op-Amp"
U7: "8-Channel, 12-Bit SAR ADC with I2C Interface"
U9_0 U9_1: "Quad Op-Amp"

## Via types
v1: diameter 30, hole 18, Top Layer to Bottom Layer, 251 vias
v2: diameter 25.98, hole 12.99, Top Layer to Bottom Layer, tented top, 11 vias
v3: diameter 30, hole 18, Top Layer to Bottom Layer, tented both sides, 6 vias
v4: diameter 28, hole 18, Top Layer to Bottom Layer, 1 vias

## Nets (pads, with @x,y where several pads share a name; then routed paths per layer and width w, separated by ;. In a path a pad name is that pad's centre, name@x,y a point inside that pad or via, vN(x,y) a via of type N, cw(c..) or ccw(c..) an arc to the next point about the centre after c; other vN are vias at no path point)
GND: C1.1 C3.1 C6.1 C7.1 C8.1 C9.1 C10.1 C11.1 C12.2 C13.1 C14.1 C15.2 C16.1 C17.1 C18.1 C18_0.1 C18_1.1 C19.1 C19_0.1 C19_1.1 C20.1 C21.1 C22_0.1 C22_1.1 C23_0.1 C23_1.1 C24_0.1 C24_1.1 C25_0.1 C25_1.1 C26_0.1 C26_1.1 J1.1 J1.3 J1.5 J1.7 J2.1 J2.3 J2.5 J2.7 J2B.7 J2B.8 J2B.15 J2B.16 J2B.23 J2B.24 J2B.31 J2B.32 J2B.39 J2B.40 J2T.7 J2T.8 J2T.15 J2T.16 J2T.23 J2T.24 J2T.31 J2T.32 J2T.39 J2T.40 J3B.9 J3B.10 J3B.15 J3B.16 J3B.21 J3B.22 J3B.27 J3B.28 J3B.33 J3B.34 J3T.9 J3T.10 J3T.15 J3T.16 J3T.21 J3T.22 J3T.27 J3T.28 J3T.33 J3T.34 J4B.13 J4B.14 J4B.19 J4B.20 J4B.25 J4B.26 J4B.31 J4B.32 J4B.35 J4B.36 J4T.13 J4T.14 J4T.19 J4T.20 J4T.25 J4T.26 J4T.31 J4T.32 J4T.35 J4T.36 J5B.11 J5B.12 J5B.17 J5B.18 J5B.23 J5B.24 J5B.29 J5B.30 J5B.35 J5B.36 J5T.11 J5T.12 J5T.17 J5T.18 J5T.23 J5T.24 J5T.29 J5T.30 J5T.35 J5T.36 LED1.1 LED3.1 R3.1 R24.2 R25.2 R26.2 R27_0.2 R27_1.2 R29.2 R30.2 R39_0.1 R39_1.1 R40_0.2 R40_1.2 R58_0.1 R58_1.1 U1.2 U1.3 U1.7 U1.9 U3.3 U3.6 U3.9 U4.11 U5.12 U5.19 U5.20 U5.21 U5_0.1 U5_1.1 U6.11 U7.6 U7.9 U7.10 U7.11 U7.18 U7.19 U7.20 U7.25 U8_0.1 U8_1.1 U9_0.11 U9_1.11 | length 14331.4
  Top Layer w10: C18_0.1@-3326.61,825 -3326.61,809.57 -3300,782.95 U5_0.1@-3300,757.68 ; U5_0.1@-3300.24,757.44 v3(-3240,757.44) ; R39_0.1@-3087.4,587.95 v3(-3087.4,517.6) -3067.05,537.95 C25_0.1@-3036.02,537.95 ; R27_0.2@-3087.4,782.95 v3(-3087.4,842.6) -3077.76,832.95 C23_0.1@-3041.02,832.95 ; v1(-2691.02,548.98) C22_0.1@-2745.59,548.98 -2745.59,654.41 -2713.82,686.18 U9_0.11@-2643.62,686.18 ; R3.1@-2650,-1325.32 v1(-2650,-1290) ; v1(-2606,-1409) -2590.86,-1393.86 U1.7@-2549.06,-1393.86 ; LED1.1@-2552.01,-1670 v1(-2495,-1670) ; v1(-2550,-1205) -2549.06,-1205.94 C1.1@-2549.06,-1270 ; C26_0.1@-2470.79,538.98 -2428.98,538.98 v1(-2424.41,534.41) R40_0.2@-2424.41,588.98 ; C24_0.1@-2466.57,832.95 -2427.05,832.95 v1@-2425.2,834.8 ; U1.2@-2430.94,-1393.86 -2397.86,-1393.86 v1(-2389,-1385) -2397.67,-1376.33 U1.3@-2430.94,-1376.33 ; R58_0.1@-2425.2,782.95 v1@-2425.2,834.8 ; v1(-2420,840) v1@-2425.2,834.8 ; v1(-2305,290) C12.2@-2258.43,290 ; C14.1@-2258.43,115 -2258.43,78.43 -2255,75 v1(-2250,75) ; v1(-2210,-315) R26.2@-2150,-315 ; v1(-2190,-205) -2180,-195 C16.1@-2156.02,-195 ; v1(-2190,-140) -2175,-155 C17.1@-2156.02,-155 ; C19_0.1@-2170.59,821.02 -2170.59,803.54 -2144.21,777.17 U8_0.1@-2144.21,748.27 -2053.26,748.27 v2(-2049.41,752.12) ; v1(-2170,-1495) C7.1@-2120.43,-1495 ; v1(-2125,-1350) C6.1@-2125,-1316.02 ; C8.1@-2078.98,-880 v1(-2040,-880) ; LED3.1@-2053.5,-1670 v1(-2000,-1670) ; C11.1@-2013.62,-50 -2012.28,-51.34 -2012.28,-72 ; U5.21@-2012.28,-155.32 v2(-2016.22,-151.38) -2031.97,-135.63 U5.20@-2031.97,-101.18 -2031.97,-78.97 -2025,-72 -2012.28,-72 ; U5.19@-2012.28,-101.18 -2012.28,-72 ; U3.3@-2010.16,-1419.06 -2010.16,-1449.84 v1(-1995,-1465) ; U3.6@-2010.16,-1300.94 -2010.16,-1270.16 v1(-1990,-1250) ; U5.21@-1972.91,-194.68 U5.12@-1918.78,-194.68 ; v1(-1940,70) C10.1@-1986.38,70 -1985,71.38 -1985,175 -1955,205 U6.11@-1884.21,205 ; C9.1@-1898.98,-555 v1(-1865,-555) ; U4.11@-1877.8,-835.16 -1854.84,-835.16 v1(-1825,-865) ; C18_1.1@-1861.61,825 -1861.61,809.57 -1835,782.95 U5_1.1@-1835,757.68 ; U5_1.1@-1835.24,757.44 -1775,757.44 v3(-1775,755) ; R25.2@-1835.2,-315 v1(-1775,-315) ; C15.2@-1761.38,115 v1(-1730,115) ; C13.1@-1761.38,290 -1745,290 v1(-1720,315) ; R24.2@-1752.6,-250 v1(-1695,-250) ; R39_1.1@-1622.4,587.95 v3(-1622.4,517.6) -1602.05,537.95 C25_1.1@-1571.02,537.95 ; R27_1.2@-1622.4,782.95 v3(-1622.4,842.6) -1612.76,832.95 C23_1.1@-1576.02,832.95 ; v1(-1226.02,548.98) C22_1.1@-1280.59,548.98 -1280.59,654.41 -1248.82,686.18 U9_1.11@-1178.62,686.18 ; C26_1.1@-1005.79,538.98 -963.98,538.98 v1(-959.41,534.41) R40_1.2@-959.41,588.98 ; C24_1.1@-1001.57,832.95 -962.05,832.95 v1@-960.2,834.8 ; R58_1.1@-960.2,782.95 v1@-960.2,834.8 ; v1(-955,840) v1@-960.2,834.8 ; C19_1.1@-705.59,821.02 -705.59,803.54 -679.21,777.17 U8_1.1@-679.21,748.27 v1(-631.73,748.27)
  Top Layer w30: J2T.39@-3435,-1650 v1(-3325,-1650) J2T.40@-3215,-1650 ; J2T.31@-3435,-1250 v1(-3325,-1250) J2T.32@-3215,-1250 ; J2T.23@-3435,-850 v1(-3325,-850) J2T.24@-3215,-850 ; J2T.15@-3435,-450 v1(-3325,-450) J2T.16@-3215,-450 ; J2T.7@-3435,-50 v1(-3325,-50) J2T.8@-3215,-50 ; v1(-3400,1050) J1.1@-3400,1175 J1.3@-3300,1175 ; v1(-3300,1050) J1.3@-3300,1175 ; J1.7@-3100,1175 J1.5@-3200,1175 J1.3@-3300,1175 ; J4T.35@-3085,-1450 v1(-2975,-1450) J4T.36@-2865,-1450 ; J4T.31@-3085,-1250 v1(-2975,-1250) J4T.32@-2865,-1250 ; J4T.25@-3085,-950 v1(-2975,-950) J4T.26@-2865,-950 ; J4T.19@-3085,-650 v1(-3025,-650) J4T.20@-2865,-650 ; J4T.13@-3085,-350 v1(-3025,-350) ; v1(-2925,-350) J4T.14@-2865,-350 ; v1@-2490,-1440 v2(-2490,-1385) ; v1(-2489,-1500) C3.1@-2430.94,-1500 v1(-2380,-1500) ; v1(-1500,1050) J2.1@-1500,1175 J2.3@-1400,1175 J2.5@-1300,1175 ; v1(-1300,1050) J2.5@-1300,1175 ; J2.7@-1200,1175 J2.5@-1300,1175 ; J3T.33@-1135,-1350 v1(-1025,-1350) J3T.34@-915,-1350 ; J3T.27@-1135,-1050 v1(-1025,-1050) J3T.28@-915,-1050 ; J3T.21@-1135,-750 v1(-1025,-750) J3T.22@-915,-750 ; J3T.15@-1135,-450 v1(-1025,-450) J3T.16@-915,-450 ; J3T.9@-1135,-150 v1(-1025,-150) J3T.10@-915,-150 ; J5T.35@-785,-1450 v1(-675,-1450) J5T.36@-565,-1450 ; J5T.29@-785,-1150 v1(-675,-1150) J5T.30@-565,-1150 ; J5T.23@-785,-850 v1(-675,-850) J5T.24@-565,-850 ; J5T.17@-785,-550 v1(-675,-550) J5T.18@-565,-550 ; J5T.11@-785,-250 v1(-675,-250) J5T.12@-565,-250
  Bottom Layer w10: R30.2@-2255.79,843.14 v1(-2255.79,889.21) ; R29.2@-2230.79,633.34 -2225.45,628 -2123.96,628 C20.1@-2121.22,630.74 -2121.22,601.22 v1(-2085,565) ; C20.1@-2120,631.96 C18.1@-2120,678.98 ; U7.18@-2105.51,824.95 -2074.06,825 -2055.32,806.26 U7.20@-2055.32,855.46 ; U7.25@-2075,825 U7.19@-2075,855.46 ; U7.11@-2055.32,696.06 U7.25@-2055.32,746.26 ; U7.10@-2035.63,696.06 U7.25@-2035.63,765.94 ; U7.9@-2015.94,696.02 U7.25@-2015.94,765.9 ; v2(-2002.17,752.12) -1976.57,726.53 U7.6@-1946.06,726.53 ; C19.1@-1995.79,629.72 v1(-1995.79,580.79) -1960.79,615.79 C21.1@-1960.79,629.72
  Bottom Layer w30: J2B.39@-3435,-1650 v1(-3325,-1650) J2B.40@-3215,-1650 ; J2B.31@-3435,-1250 v1(-3325,-1250) J2B.32@-3215,-1250 ; J2B.23@-3435,-850 v1(-3325,-850) J2B.24@-3215,-850 ; J2B.15@-3435,-450 v1(-3325,-450) J2B.16@-3215,-450 ; J2B.7@-3435,-50 v1(-3325,-50) J2B.8@-3215,-50 ; J4B.13@-3095,-350 J4B.13@-3085,-350 v1(-3025,-350) v1(-2925,-350) J4B.14@-2875,-350 ; J4B.35@-3085,-1450 v1(-2975,-1450) J4B.36@-2875,-1450 ; J4B.31@-3085,-1250 v1(-2975,-1250) J4B.32@-2875,-1250 ; J4B.25@-3085,-950 v1(-2975,-950) J4B.26@-2875,-950 ; J4B.19@-3085,-650 v1(-3025,-650) J4B.20@-2875,-650 ; J3B.33@-1135,-1350 v1(-1025,-1350) J3B.34@-920,-1350 ; J3B.27@-1135,-1050 v1(-1025,-1050) J3B.28@-920,-1050 ; J3B.21@-1135,-750 v1(-1025,-750) J3B.22@-920,-750 ; J3B.15@-1135,-450 v1(-1025,-450) J3B.16@-920,-450 ; J3B.9@-1135,-150 v1(-1025,-150) J3B.10@-920,-150 ; J5B.35@-785,-1450 v1(-675,-1450) J5B.36@-565,-1450 ; J5B.29@-785,-1150 v1(-675,-1150) J5B.30@-565,-1150 ; J5B.23@-785,-850 v1(-675,-850) J5B.24@-565,-850 ; J5B.17@-785,-550 v1(-675,-550) J5B.18@-565,-550 ; J5B.11@-785,-250 v1(-675,-250) J5B.12@-565,-250
  other v1: -2488,-1442
  other v2: -2043.62,-1360 -1996.38,-1360 -2016.22,-198.62 -1968.98,-198.62 -1968.98,-151.38 -2049.41,799.36 -2002.17,799.36
J2-1: J2B.1 J2T.1 | length 130
  Top Layer w30: J2T.1@-3435,250 v1(-3370,250)
  Bottom Layer w30: J2B.1@-3435,250 v1(-3370,250)
J2-2: J2B.2 J2T.2 | length 130
  Top Layer w30: v1(-3280,250) J2T.2@-3215,250
  Bottom Layer w30: v1(-3280,250) J2B.2@-3215,250
J2-3: J2B.3 J2T.3 | length 130
  Top Layer w30: J2T.3@-3435,150 v1(-3370,150)
  Bottom Layer w30: J2B.3@-3435,150 v1(-3370,150)
J2-4: J2B.4 J2T.4 | length 130
  Top Layer w30: v1(-3280,150) J2T.4@-3215,150
  Bottom Layer w30: v1(-3280,150) J2B.4@-3215,150
J2-5: J2B.5 J2T.5 | length 130
  Top Layer w30: J2T.5@-3435,50 v1(-3370,50)
  Bottom Layer w30: J2B.5@-3435,50 v1(-3370,50)
J2-6: J2B.6 J2T.6 | length 130
  Top Layer w30: v1(-3280,50) J2T.6@-3215,50
  Bottom Layer w30: v1(-3280,50) J2B.6@-3215,50
J2-9: J2B.9 J2T.9 | length 130
  Top Layer w30: J2T.9@-3435,-150 v1(-3370,-150)
  Bottom Layer w30: J2B.9@-3435,-150 v1(-3370,-150)
J2-10: J2B.10 J2T.10 | length 130
  Top Layer w30: v1(-3280,-150) J2T.10@-3215,-150
  Bottom Layer w30: v1(-3280,-150) J2B.10@-3215,-150
J2-11: J2B.11 J2T.11 | length 130
  Top Layer w30: J2T.11@-3435,-250 v1(-3370,-250)
  Bottom Layer w30: J2B.11@-3435,-250 v1(-3370,-250)
J2-12: J2B.12 J2T.12 | length 130
  Top Layer w30: v1(-3280,-250) J2T.12@-3215,-250
  Bottom Layer w30: v1(-3280,-250) J2B.12@-3215,-250
J2-13: J2B.13 J2T.13 | length 130
  Top Layer w30: J2T.13@-3435,-350 v1(-3370,-350)
  Bottom Layer w30: J2B.13@-3435,-350 v1(-3370,-350)
J2-14: J2B.14 J2T.14 | length 130
  Top Layer w30: v1(-3280,-350) J2T.14@-3215,-350
  Bottom Layer w30: v1(-3280,-350) J2B.14@-3215,-350
J2-17: J2B.17 J2T.17 | length 130
  Top Layer w30: J2T.17@-3435,-550 v1(-3370,-550)
  Bottom Layer w30: J2B.17@-3435,-550 v1(-3370,-550)
J2-18: J2B.18 J2T.18 | length 130
  Top Layer w30: v1(-3280,-550) J2T.18@-3215,-550
  Bottom Layer w30: v1(-3280,-550) J2B.18@-3215,-550
J2-19: J2B.19 J2T.19 | length 130
  Top Layer w30: J2T.19@-3435,-650 v1(-3370,-650)
  Bottom Layer w30: J2B.19@-3435,-650 v1(-3370,-650)
J2-20: J2B.20 J2T.20 | length 130
  Top Layer w30: v1(-3280,-650) J2T.20@-3215,-650
  Bottom Layer w30: v1(-3280,-650) J2B.20@-3215,-650
J2-21: J2B.21 J2T.21 | length 130
  Top Layer w30: J2T.21@-3435,-750 v1(-3370,-750)
  Bottom Layer w30: J2B.21@-3435,-750 v1(-3370,-750)
J2-22: J2B.22 J2T.22 | length 130
  Top Layer w30: v1(-3280,-750) J2T.22@-3215,-750
  Bottom Layer w30: v1(-3280,-750) J2B.22@-3215,-750
J2-25: J2B.25 J2T.25 | length 130
  Top Layer w30: J2T.25@-3435,-950 v1(-3370,-950)
  Bottom Layer w30: J2B.25@-3435,-950 v1(-3370,-950)
J2-26: J2B.26 J2T.26 | length 130
  Top Layer w30: v1(-3280,-950) J2T.26@-3215,-950
  Bottom Layer w30: v1(-3280,-950) J2B.26@-3215,-950
J2-27: J2B.27 J2T.27 | length 130
  Top Layer w30: J2T.27@-3435,-1050 v1(-3370,-1050)
  Bottom Layer w30: J2B.27@-3435,-1050 v1(-3370,-1050)
J2-28: J2B.28 J2T.28 | length 130
  Top Layer w30: v1(-3280,-1050) J2T.28@-3215,-1050
  Bottom Layer w30: v1(-3280,-1050) J2B.28@-3215,-1050
J2-29: J2B.29 J2T.29 | length 130
  Top Layer w30: J2T.29@-3435,-1150 v1(-3370,-1150)
  Bottom Layer w30: J2B.29@-3435,-1150 v1(-3370,-1150)
J2-30: J2B.30 J2T.30 | length 130
  Top Layer w30: v1(-3280,-1150) J2T.30@-3215,-1150
  Bottom Layer w30: v1(-3280,-1150) J2B.30@-3215,-1150
J2-33: J2B.33 J2T.33 | length 130
  Top Layer w30: J2T.33@-3435,-1350 v1(-3370,-1350)
  Bottom Layer w30: J2B.33@-3435,-1350 v1(-3370,-1350)
J2-34: J2B.34 J2T.34 | length 130
  Top Layer w30: v1(-3280,-1350) J2T.34@-3215,-1350
  Bottom Layer w30: v1(-3280,-1350) J2B.34@-3215,-1350
J2-35: J2B.35 J2T.35 | length 130
  Top Layer w30: J2T.35@-3435,-1450 v1(-3370,-1450)
  Bottom Layer w30: J2B.35@-3435,-1450 v1(-3370,-1450)
J2-36: J2B.36 J2T.36 | length 130
  Top Layer w30: v1(-3280,-1450) J2T.36@-3215,-1450
  Bottom Layer w30: v1(-3280,-1450) J2B.36@-3215,-1450
J2-37: J2B.37 J2T.37 | length 130
  Top Layer w30: J2T.37@-3435,-1550 v1(-3370,-1550)
  Bottom Layer w30: J2B.37@-3435,-1550 v1(-3370,-1550)
J2-38: J2B.38 J2T.38 | length 130
  Top Layer w30: v1(-3280,-1550) J2T.38@-3215,-1550
  Bottom Layer w30: v1(-3280,-1550) J2B.38@-3215,-1550
J3-1: J3B.1 J3T.1 | length 130
  Top Layer w30: J3T.1@-1135,250 v1(-1070,250)
  Bottom Layer w30: J3B.1@-1135,250 v1(-1070,250)
J3-2: J3B.2 J3T.2 | length 130
  Top Layer w30: v1(-980,250) J3T.2@-915,250
  Bottom Layer w30: v1(-980,250) J3B.2@-915,250
J3-3: J3B.3 J3T.3 | length 130
  Top Layer w30: J3T.3@-1135,150 v1(-1070,150)
  Bottom Layer w30: J3B.3@-1135,150 v1(-1070,150)
J3-4: J3B.4 J3T.4 | length 130
  Top Layer w30: v1(-980,150) J3T.4@-915,150
  Bottom Layer w30: v1(-980,150) J3B.4@-915,150
J3-5: J3B.5 J3T.5 | length 130
  Top Layer w30: J3T.5@-1135,50 v1(-1070,50)
  Bottom Layer w30: J3B.5@-1135,50 v1(-1070,50)
J3-6: J3B.6 J3T.6 | length 130
  Top Layer w30: v1(-980,50) J3T.6@-915,50
  Bottom Layer w30: v1(-980,50) J3B.6@-915,50
J3-7: J3B.7 J3T.7 | length 130
  Top Layer w30: J3T.7@-1135,-50 v1(-1070,-50)
  Bottom Layer w30: J3B.7@-1135,-50 v1(-1070,-50)
J3-8: J3B.8 J3T.8 | length 130
  Top Layer w30: v1(-980,-50) J3T.8@-915,-50
  Bottom Layer w30: v1(-980,-50) J3B.8@-915,-50
J3-11: J3B.11 J3T.11 | length 130
  Top Layer w30: J3T.11@-1135,-250 v1(-1070,-250)
  Bottom Layer w30: J3B.11@-1135,-250 v1(-1070,-250)
J3-12: J3B.12 J3T.12 | length 130
  Top Layer w30: v1(-980,-250) J3T.12@-915,-250
  Bottom Layer w30: v1(-980,-250) J3B.12@-915,-250
J3-13: J3B.13 J3T.13 | length 130
  Top Layer w30: J3T.13@-1135,-350 v1(-1070,-350)
  Bottom Layer w30: J3B.13@-1135,-350 v1(-1070,-350)
J3-14: J3B.14 J3T.14 | length 130
  Top Layer w30: v1(-980,-350) J3T.14@-915,-350
  Bottom Layer w30: v1(-980,-350) J3B.14@-915,-350
J3-17: J3B.17 J3T.17 | length 130
  Top Layer w30: J3T.17@-1135,-550 v1(-1070,-550)
  Bottom Layer w30: J3B.17@-1135,-550 v1(-1070,-550)
J3-18: J3B.18 J3T.18 | length 130
  Top Layer w30: v1(-980,-550) J3T.18@-915,-550
  Bottom Layer w30: v1(-980,-550) J3B.18@-915,-550
J3-19: J3B.19 J3T.19 | length 130
  Top Layer w30: J3T.19@-1135,-650 v1(-1070,-650)
  Bottom Layer w30: J3B.19@-1135,-650 v1(-1070,-650)